# Altium PCB DriversConditioning.PcbDoc
Units mil, origin at the board's own origin, x right, y up, seen from the top; angles counter-clockwise.
Board outline 6000 x 4000 mil, 2 copper layers (Top Layer, Bottom Layer); 1 components, 0 nets, 82 pads, 0 vias.
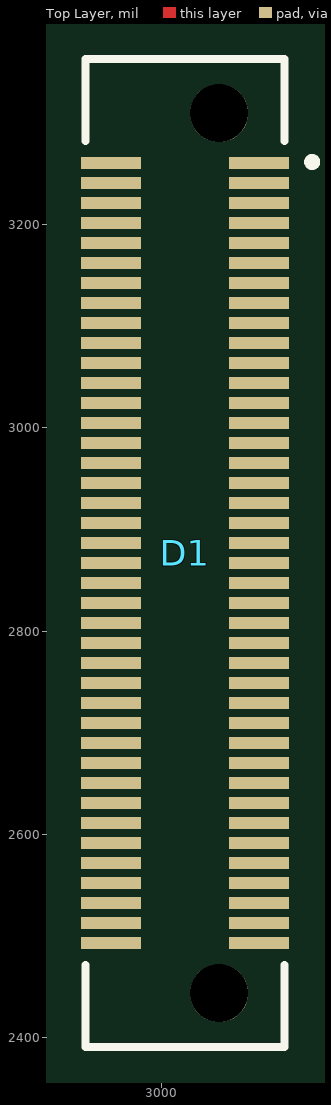
[diagram p0: Top Layer view]
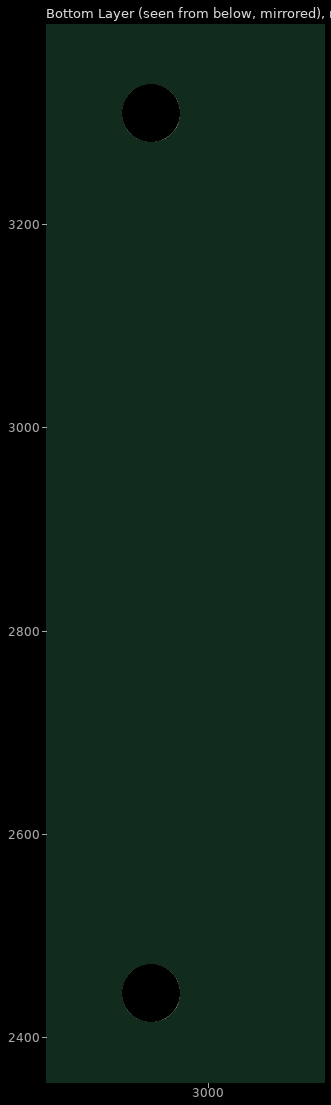
[diagram p1: Bottom Layer view, seen from below]

## Layer stack, top to bottom
Top Solder: solder mask 0.4, Solder Resist, Dk 3.5
Top Layer: signal copper 1.4
Dielectric 1: dielectric 12.6, FR-4, Dk 4.8
Bottom Layer: signal copper 1.4
Bottom Solder: solder mask 0.4, Solder Resist, Dk 3.5

## Board outline
1000,1000 7000,1000 7000,5000 1000,5000

## Design rules (kind name [scope] priority, off if disabled: settings)
Clearance [All] p1: gap=10 ignorepadtopadclearanceinfootprint=FALSE except(0: Arc-Hole Track-Hole SMDPad-Hole THPad-Hole Via-Hole Fill-Hole Poly-Hole Region-Hole Text-Hole)
PolygonConnect [All] p1: connectstyle=Relief reliefconductorwidth=10 reliefentries=4 polygonreliefangle="90 Angle" airgapwidth=10
RoutingVias [All] p1: holewidth=28 width=50 viastyle="Through Hole" minholewidth=28 minwidth=50 maxholewidth=28 maxwidth=50
SolderMaskExpansion [All] p1: expansion=4
Width [All] p1: maxlimit=10 minlimit=10 preferedwidth=10
30 further rules are at their usual default settings.

## Components (designator, comment, footprint, x,y, rotation, side; value= is the part's Value field where it differs from the comment)
D1 "LSHM-140-02.5-L-DV-A-N-K-TR" SAMTEC_LSHM-140-02.5-L-DV-A-N-K-TR 3022.83,2876.69 r90 top

## Footprints (in the part's own frame and the unit in brackets; to place one, negate y for a bottom-side part, rotate by r counter-clockwise, add the part's x,y. Pads: shape width x height; smd on the part's side, far side on the other; paste and mask are expansions set on the pad)
SAMTEC_LSHM-140-02.5-L-DV-A-N-K-TR [mm]
  rect 0.3x1.5 smd: 01(9.75,-1.85) 02(9.75,1.85) 03(9.25,-1.85) 04(9.25,1.85) 05(8.75,-1.85) 06(8.75,1.85) 07(8.25,-1.85) 08(8.25,1.85) 09(7.75,-1.85) 10(7.75,1.85) 11(7.25,-1.85) 12(7.25,1.85) 13(6.75,-1.85) 14(6.75,1.85) 15(6.25,-1.85) 16(6.25,1.85) 17(5.75,-1.85) 18(5.75,1.85) 19(5.25,-1.85) 20(5.25,1.85) 21(4.75,-1.85) 22(4.75,1.85) 23(4.25,-1.85) 24(4.25,1.85) 25(3.75,-1.85) 26(3.75,1.85) 27(3.25,-1.85) 28(3.25,1.85) 29(2.75,-1.85) 30(2.75,1.85) 31(2.25,-1.85) 32(2.25,1.85) 33(1.75,-1.85) 34(1.75,1.85) 35(1.25,-1.85) 36(1.25,1.85) 37(0.75,-1.85) 38(0.75,1.85) 39(0.25,-1.85) 40(0.25,1.85) 41(-0.25,-1.85) 42(-0.25,1.85) 43(-0.75,-1.85) 44(-0.75,1.85) 45(-1.25,-1.85) 46(-1.25,1.85) 47(-1.75,-1.85) 48(-1.75,1.85) 49(-2.25,-1.85) 50(-2.25,1.85) 51(-2.75,-1.85) 52(-2.75,1.85) 53(-3.25,-1.85) 54(-3.25,1.85) 55(-3.75,-1.85) 56(-3.75,1.85) 57(-4.25,-1.85) 58(-4.25,1.85) 59(-4.75,-1.85) 60(-4.75,1.85) 61(-5.25,-1.85) 62(-5.25,1.85) 63(-5.75,-1.85) 64(-5.75,1.85) 65(-6.25,-1.85) 66(-6.25,1.85) 67(-6.75,-1.85) 68(-6.75,1.85) 69(-7.25,-1.85) 70(-7.25,1.85) 71(-7.75,-1.85) 72(-7.75,1.85) 73(-8.25,-1.85) 74(-8.25,1.85) 75(-8.75,-1.85) 76(-8.75,1.85) 77(-9.25,-1.85) 78(-9.25,1.85) 79(-9.75,-1.85) 80(-9.75,1.85)
  round 1.45 hole 1.45 unplated: ""(-11,-0.85) ""(11,-0.85)
  silkscreen extent -12.35,-3.27 12.35,2.49

## Part data
D1: "LSHM - Samtec 0.50mm Razor Beam High-Speed Hermaphroditic Terminal / Socket Strip.", Package=None, Availability=Unavailable, MP=LSHM-140-02.5-L-DV-A-N-K-TR, Price=None

## Nets (pads, with @x,y where several pads share a name; then routed paths per layer and width w, separated by ;. In a path a pad name is that pad's centre, name@x,y a point inside that pad or via, vN(x,y) a via of type N, cw(c..) or ccw(c..) an arc to the next point about the centre after c; other vN are vias at no path point)
pads on no net: D1. D1.01 D1.02 D1.03 D1.04 D1.05 D1.06 D1.07 D1.08 D1.09 D1.10 D1.11 D1.12 D1.13 D1.14 D1.15 D1.16 D1.17 D1.18 D1.19 D1.20 D1.21 D1.22 D1.23 D1.24 D1.25 D1.26 D1.27 D1.28 D1.29 D1.30 D1.31 D1.32 D1.33 D1.34 D1.35 D1.36 D1.37 D1.38 D1.39 D1.40 D1.41 D1.42 D1.43 D1.44 D1.45 D1.46 D1.47 D1.48 D1.49 D1.50 D1.51 D1.52 D1.53 D1.54 D1.55 D1.56 D1.57 D1.58 D1.59 D1.60 D1.61 D1.62 D1.63 D1.64 D1.65 D1.66 D1.67 D1.68 D1.69 D1.70 D1.71 D1.72 D1.73 D1.74 D1.75 D1.76 D1.77 D1.78 D1.79 D1.80